# Altium PCB CW308A_Generic.PcbDoc
Units mil, origin at the board's own origin, x right, y up, seen from the top; angles counter-clockwise.
Board outline 2060 x 2680 mil, 2 copper layers (Top Layer, Bottom Layer); 6 components, 0 nets, 481 pads, 24 vias.
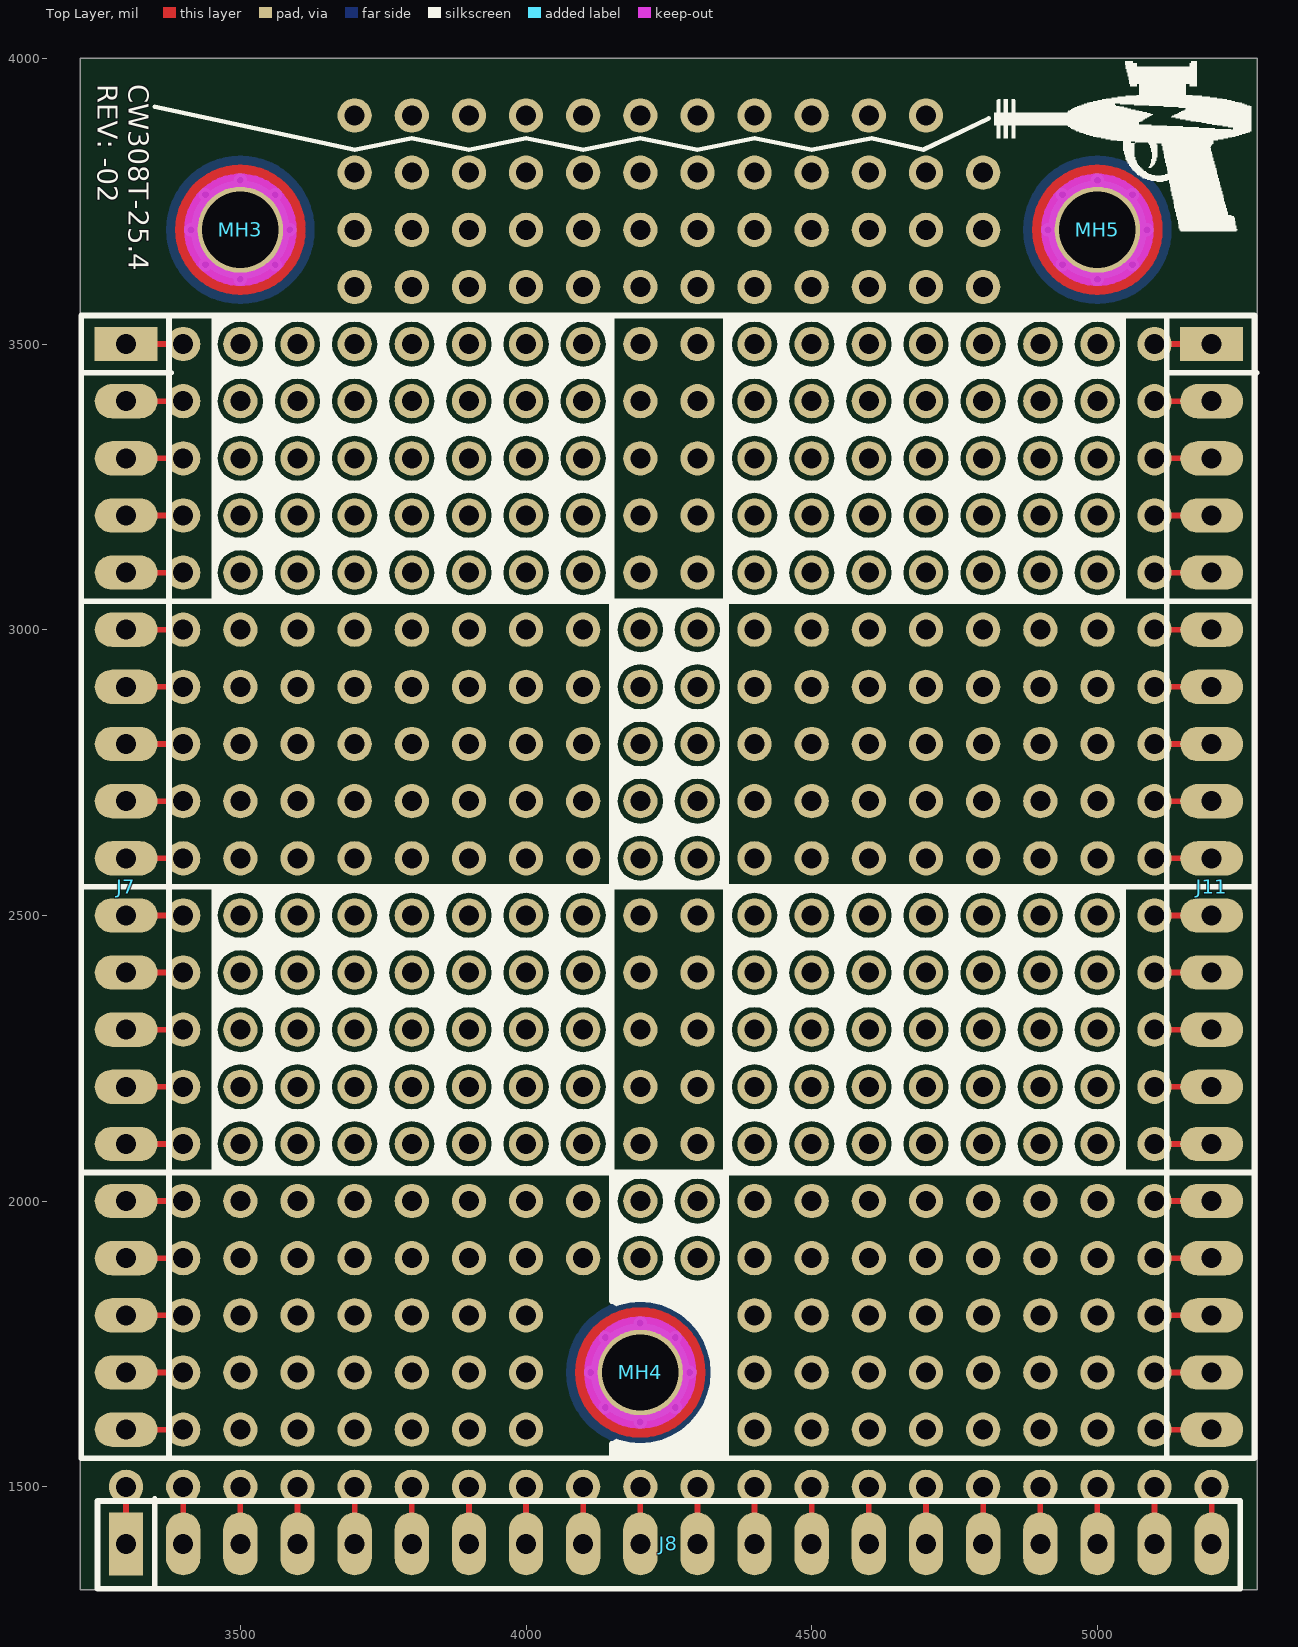
[diagram p0: Top Layer view]
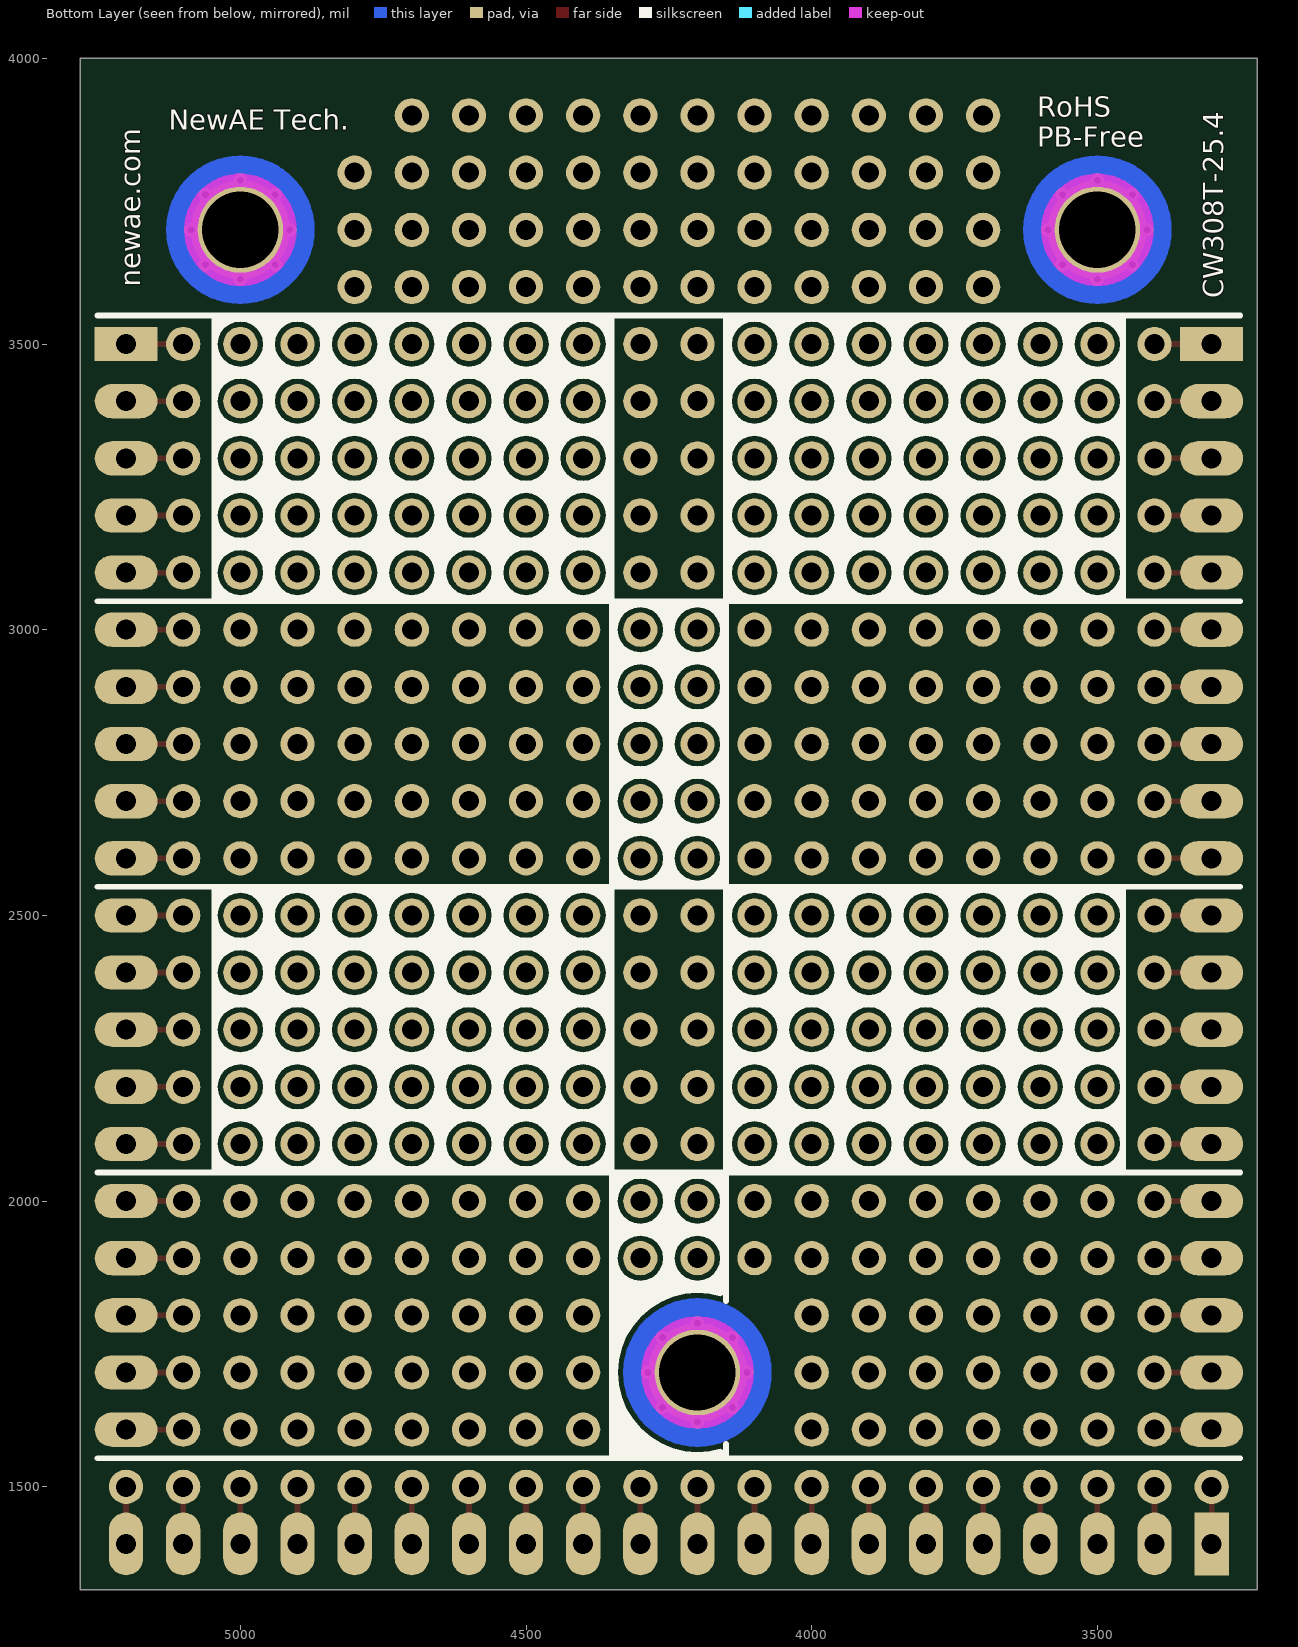
[diagram p1: Bottom Layer view, seen from below]

## Layer stack, top to bottom
Top Solder: solder mask 0.4, Solder Resist, Dk 3.5
Top Layer: signal copper 1.4
Dielectric 1: dielectric 12.6, FR-4, Dk 4.8
Bottom Layer: signal copper 1.4
Bottom Solder: solder mask 0.4, Solder Resist, Dk 3.5

## Board outline
3220,1320 3220,4000 5280,4000 5280,1320

## Design rules (kind name [scope] priority, off if disabled: settings)
Clearance [All] p1: gap=10 except(9: Arc-Poly Track-Poly SMDPad-Poly THPad-Poly Via-Poly Fill-Poly Poly-Poly)
PolygonConnect [All] p1: connectstyle=Relief reliefconductorwidth=10 reliefentries=4 polygonreliefangle="90 Angle" airgapwidth=10
RoutingVias [All] p1: holewidth=28 width=50 viastyle="Through Hole" minholewidth=28 minwidth=50 maxholewidth=28 maxwidth=50
SilkToSolderMaskClearance [InPadClass('All Pads')] p1: minsilkscreentomaskgap=10 clearancetoexposedcopper=FALSE
SolderMaskExpansion [All] p1: expansion=4
Width [All] p1: maxlimit=25 minlimit=10 preferedwidth=15 minimp=50.000000 maximp=50.000000 favimp=50.000000
29 further rules are at their usual default settings.

## Components (designator, comment, footprint, x,y, rotation, side; value= is the part's Value field where it differs from the comment)
J7 "20-Pin Header" 801-87-020-10-001101 3300,3500 r0 top locked
J8 "20-Pin Header" 801-87-020-10-001101 3300,1400 r90 top locked
J11 "20-Pin Header" 801-87-020-10-001101 5200,3500 r0 top locked
MH3 "Mounting-Hole-RND-Altium" Mounting-Hole-RND-Altium 3500,3700 r0 top locked
MH4 "Mounting-Hole-RND-Altium" Mounting-Hole-RND-Altium 4200,1700 r0 top locked
MH5 "Mounting-Hole-RND-Altium" Mounting-Hole-RND-Altium 5000,3700 r0 top locked

## Footprints (in the part's own frame and the unit in brackets; to place one, negate y for a bottom-side part, rotate by r counter-clockwise, add the part's x,y. Pads: shape width x height; smd on the part's side, far side on the other; paste and mask are expansions set on the pad)
801-87-020-10-001101 [mil]
  rect 110x60 hole 35: 1(0,0)
  oval 110x60 hole 35: 2(0,-100) 3(0,-200) 4(0,-300) 5(0,-400) 6(0,-500) 7(0,-600) 8(0,-700) 9(0,-800) 10(0,-900) 11(0,-1000) 12(0,-1100) 13(0,-1200) 14(0,-1300) 15(0,-1400) 16(0,-1500) 17(0,-1600) 18(0,-1700) 19(0,-1800) 20(0,-1900)
  silkscreen extent -79,-1950 79,50, body extent -50,-1950 50,50, height 224
Mounting-Hole-RND-Altium [mm] "Mounting Hole, Altium, 4.4mm pad, 3.4mm plated hole"
  round 4.4 hole 3.4 mask+0.038: MOUNT(0,0)
  Top Layer circle w1: c0,0 r2.4
  Bottom Layer circle w1.2: c0,0 r2.702
  Keep-Out Layer circle w0.6: c0,0 r2.2

## Part data
J7 J8 J11: library part 801-87-020-10-001101, "1x20 Header, Machined"
MH3 MH4 MH5: library part CMP-0001-00029-1, "Mounting Hole, Altium, 4.4mm pad, 3.4mm plated hole"

## Free pads (board coordinates)
  round 60 hole 35: 0(3300,1500) 0(3400,1500) 0(3400,1600) 0(3400,1700) 0(3400,1800) 0(3400,1900) 0(3400,2000) 0(3400,2100) 0(3400,2200) 0(3400,2300) 0(3400,2400) 0(3400,2500) 0(3400,2600) 0(3400,2700) 0(3400,2800) 0(3400,2900) 0(3400,3000) 0(3400,3100) 0(3400,3200) 0(3400,3300) 0(3400,3400) 0(3400,3500) 0(3500,1500) 0(3500,1600) 0(3500,1700) 0(3500,1800) 0(3500,1900) 0(3500,2000) 0(3500,2100) 0(3500,2200) 0(3500,2300) 0(3500,2400) 0(3500,2500) 0(3500,2600) 0(3500,2700) 0(3500,2800) 0(3500,2900) 0(3500,3000) 0(3500,3100) 0(3500,3200) 0(3500,3300) 0(3500,3400) 0(3500,3500) 0(3600,1500) 0(3700,1500) 0(3800,1500) 0(3900,1500) 0(4000,1500) 0(4100,1500) 0(4200,1500) 0(4300,1500) 0(4400,1500) 0(4400,1600) 0(4400,1700) 0(4400,1800) 0(4500,1500) 0(4600,1500) 0(4700,1500) 0(4800,1500) 0(4900,1500) 0(5000,1500) 0(5100,1500) 0(5100,1600) 0(5100,1700) 0(5100,1800) 0(5100,1900) 0(5100,2000) 0(5100,2100) 0(5100,2200) 0(5100,2300) 0(5100,2400) 0(5100,2500) 0(5100,2600) 0(5100,2700) 0(5100,2800) 0(5100,2900) 0(5100,3000) 0(5100,3100) 0(5100,3200) 0(5100,3300) 0(5100,3400) 0(5100,3500) 0(5200,1500) 1(3600,1600) 1(3600,1700) 1(3600,1800) 1(3600,1900) 1(3600,2000) 1(3600,2100) 1(3600,2200) 1(3600,2300) 1(3600,2400) 1(3600,2500) 1(3600,2600) 1(3600,2700) 1(3600,2800) 1(3600,2900) 1(3600,3000) 1(3600,3100) 1(3600,3200) 1(3600,3300) 1(3600,3400) 1(3600,3500) 1(4500,1600) 1(4500,1700) 1(4500,1800) 2(3700,1600) 2(3700,1700) 2(3700,1800) 2(3700,1900) 2(3700,2000) 2(3700,2100) 2(3700,2200) 2(3700,2300) 2(3700,2400) 2(3700,2500) 2(3700,2600) 2(3700,2700) 2(3700,2800) 2(3700,2900) 2(3700,3000) 2(3700,3100) 2(3700,3200) 2(3700,3300) 2(3700,3400) 2(3700,3500) 2(3700,3600) 2(3700,3700) 2(3700,3800) 2(3700,3900) 2(4600,1600) 2(4600,1700) 2(4600,1800) 3(3800,1600) 3(3800,1700) 3(3800,1800) 3(3800,1900) 3(3800,2000) 3(3800,2100) 3(3800,2200) 3(3800,2300) 3(3800,2400) 3(3800,2500) 3(3800,2600) 3(3800,2700) 3(3800,2800) 3(3800,2900) 3(3800,3000) 3(3800,3100) 3(3800,3200) 3(3800,3300) 3(3800,3400) 3(3800,3500) 3(3800,3600) 3(3800,3700) 3(3800,3800) 3(3800,3900) 3(4700,1600) 3(4700,1700) 3(4700,1800) 4(3900,1600) 4(3900,1700) 4(3900,1800) 4(3900,1900) 4(3900,2000) 4(3900,2100) 4(3900,2200) 4(3900,2300) 4(3900,2400) 4(3900,2500) 4(3900,2600) 4(3900,2700) 4(3900,2800) 4(3900,2900) 4(3900,3000) 4(3900,3100) 4(3900,3200) 4(3900,3300) 4(3900,3400) 4(3900,3500) 4(3900,3600) 4(3900,3700) 4(3900,3800) 4(3900,3900) 4(4800,1600) 4(4800,1700) 4(4800,1800) 5(4000,1600) 5(4000,1700) 5(4000,1800) 5(4000,1900) 5(4000,2000) 5(4000,2100) 5(4000,2200) 5(4000,2300) 5(4000,2400) 5(4000,2500) 5(4000,2600) 5(4000,2700) 5(4000,2800) 5(4000,2900) 5(4000,3000) 5(4000,3100) 5(4000,3200) 5(4000,3300) 5(4000,3400) 5(4000,3500) 5(4000,3600) 5(4000,3700) 5(4000,3800) 5(4000,3900) 5(4900,1600) 5(4900,1700) 5(4900,1800) 6(4100,1900) 6(4100,2000) 6(4100,2100) 6(4100,2200) 6(4100,2300) 6(4100,2400) 6(4100,2500) 6(4100,2600) 6(4100,2700) 6(4100,2800) 6(4100,2900) 6(4100,3000) 6(4100,3100) 6(4100,3200) 6(4100,3300) 6(4100,3400) 6(4100,3500) 6(4100,3600) 6(4100,3700) 6(4100,3800) 6(4100,3900) 7(4200,1900) 7(4200,2000) 7(4200,2100) 7(4200,2200) 7(4200,2300) 7(4200,2400) 7(4200,2500) 7(4200,2600) 7(4200,2700) 7(4200,2800) 7(4200,2900) 7(4200,3000) 7(4200,3100) 7(4200,3200) 7(4200,3300) 7(4200,3400) 7(4200,3500) 7(4200,3600) 7(4200,3700) 7(4200,3800) 7(4200,3900) 8(4300,1900) 8(4300,2000) 8(4300,2100) 8(4300,2200) 8(4300,2300) 8(4300,2400) 8(4300,2500) 8(4300,2600) 8(4300,2700) 8(4300,2800) 8(4300,2900) 8(4300,3000) 8(4300,3100) 8(4300,3200) 8(4300,3300) 8(4300,3400) 8(4300,3500) 8(4300,3600) 8(4300,3700) 8(4300,3800) 8(4300,3900) 9(4400,1900) 9(4400,2000) 9(4400,2100) 9(4400,2200) 9(4400,2300) 9(4400,2400) 9(4400,2500) 9(4400,2600) 9(4400,2700) 9(4400,2800) 9(4400,2900) 9(4400,3000) 9(4400,3100) 9(4400,3200) 9(4400,3300) 9(4400,3400) 9(4400,3500) 9(4400,3600) 9(4400,3700) 9(4400,3800) 9(4400,3900) 10(4500,1900) 10(4500,2000) 10(4500,2100) 10(4500,2200) 10(4500,2300) 10(4500,2400) 10(4500,2500) 10(4500,2600) 10(4500,2700) 10(4500,2800) 10(4500,2900) 10(4500,3000) 10(4500,3100) 10(4500,3200) 10(4500,3300) 10(4500,3400) 10(4500,3500) 10(4500,3600) 10(4500,3700) 10(4500,3800) 10(4500,3900) 11(4600,1900) 11(4600,2000) 11(4600,2100) 11(4600,2200) 11(4600,2300) 11(4600,2400) 11(4600,2500) 11(4600,2600) 11(4600,2700) 11(4600,2800) 11(4600,2900) 11(4600,3000) 11(4600,3100) 11(4600,3200) 11(4600,3300) 11(4600,3400) 11(4600,3500) 11(4600,3600) 11(4600,3700) 11(4600,3800) 11(4600,3900) 12(4700,1900) 12(4700,2000) 12(4700,2100) 12(4700,2200) 12(4700,2300) 12(4700,2400) 12(4700,2500) 12(4700,2600) 12(4700,2700) 12(4700,2800) 12(4700,2900) 12(4700,3000) 12(4700,3100) 12(4700,3200) 12(4700,3300) 12(4700,3400) 12(4700,3500) 12(4700,3600) 12(4700,3700) 12(4700,3800) 12(4700,3900) 13(4800,1900) 13(4800,2000) 13(4800,2100) 13(4800,2200) 13(4800,2300) 13(4800,2400) 13(4800,2500) 13(4800,2600) 13(4800,2700) 13(4800,2800) 13(4800,2900) 13(4800,3000) 13(4800,3100) 13(4800,3200) 13(4800,3300) 13(4800,3400) 13(4800,3500) 13(4800,3600) 13(4800,3700) 13(4800,3800) 13(4900,1900) 13(4900,2000) 13(4900,2100) 13(4900,2200) 13(4900,2300) 13(4900,2400) 13(4900,2500) 13(4900,2600) 13(4900,2700) 13(4900,2800) 13(4900,2900) 13(4900,3000) 13(4900,3100) 13(4900,3200) 13(4900,3300) 13(4900,3400) 13(4900,3500) 13(5000,1900) 13(5000,2000) 13(5000,2100) 13(5000,2200) 13(5000,2300) 13(5000,2400) 13(5000,2500) 13(5000,2600) 13(5000,2700) 13(5000,2800) 13(5000,2900) 13(5000,3000) 13(5000,3100) 13(5000,3200) 13(5000,3300) 13(5000,3400) 13(5000,3500) 15(5000,1700) 16(5000,1600) 17(5000,1800)

## Via types
v1: diameter 23.62, hole 11.81, Top Layer to Bottom Layer, tented both sides, 24 vias

## Nets (pads, with @x,y where several pads share a name; then routed paths per layer and width w, separated by ;. In a path a pad name is that pad's centre, name@x,y a point inside that pad or via, vN(x,y) a via of type N, cw(c..) or ccw(c..) an arc to the next point about the centre after c; other vN are vias at no path point)
pads on no net: J7.1 J7.2 J7.3 J7.4 J7.5 J7.6 J7.7 J7.8 J7.9 J7.10 J7.11 J7.12 J7.13 J7.14 J7.15 J7.16 J7.17 J7.18 J7.19 J7.20 J8.1 J8.2 J8.3 J8.4 J8.5 J8.6 J8.7 J8.8 J8.9 J8.10 J8.11 J8.12 J8.13 J8.14 J8.15 J8.16 J8.17 J8.18 J8.19 J8.20 J11.1 J11.2 J11.3 J11.4 J11.5 J11.6 J11.7 J11.8 J11.9 J11.10 J11.11 J11.12 J11.13 J11.14 J11.15 J11.16 J11.17 J11.18 J11.19 J11.20 MH3.MOUNT MH4.MOUNT MH5.MOUNT
copper on no net: | length 6000
  Top Layer w10: 3300,1400 3300,1500 ; 3300,1600 3400,1600 ; 3300,1700 3400,1700 ; 3300,1800 3400,1800 ; 3300,1900 3400,1900 ; 3300,2000 3400,2000 ; 3300,2100 3400,2100 ; 3300,2200 3400,2200 ; 3300,2300 3400,2300 ; 3300,2400 3400,2400 ; 3300,2500 3400,2500 ; 3300,2600 3400,2600 ; 3300,2700 3400,2700 ; 3300,2800 3400,2800 ; 3300,2900 3400,2900 ; 3300,3000 3400,3000 ; 3300,3100 3400,3100 ; 3300,3200 3400,3200 ; 3300,3300 3400,3300 ; 3300,3400 3400,3400 ; 3300,3500 3400,3500 ; 3400,1400 3400,1500 ; 3500,1400 3500,1500 ; 3600,1400 3600,1500 ; 3700,1400 3700,1500 ; 3800,1400 3800,1500 ; 3900,1400 3900,1500 ; 4000,1400 4000,1500 ; 4100,1400 4100,1500 ; 4200,1400 4200,1500 ; 4300,1400 4300,1500 ; 4400,1400 4400,1500 ; 4500,1400 4500,1500 ; 4600,1400 4600,1500 ; 4700,1400 4700,1500 ; 4800,1400 4800,1500 ; 4900,1400 4900,1500 ; 5000,1400 5000,1500 ; 5100,1400 5100,1500 ; 5100,1600 5200,1600 ; 5100,1700 5200,1700 ; 5100,1800 5200,1800 ; 5100,1900 5200,1900 ; 5100,2000 5200,2000 ; 5100,2100 5200,2100 ; 5100,2200 5200,2200 ; 5100,2300 5200,2300 ; 5100,2400 5200,2400 ; 5100,2500 5200,2500 ; 5100,2600 5200,2600 ; 5100,2700 5200,2700 ; 5100,2800 5200,2800 ; 5100,2900 5200,2900 ; 5100,3000 5200,3000 ; 5100,3100 5200,3100 ; 5100,3200 5200,3200 ; 5100,3300 5200,3300 ; 5100,3400 5200,3400 ; 5100,3500 5200,3500 ; 5200,1400 5200,1500
  other v1: 4200,1613.39 4138.75,1638.75 4261.25,1638.75 4113.39,1700 4286.61,1700 4138.75,1761.25 4261.25,1761.25 4200,1786.61 3500,3613.39 5000,3613.39 3438.75,3638.75 3561.25,3638.75 4938.75,3638.75 5061.25,3638.75 3413.39,3700 3586.61,3700 4913.39,3700 5086.61,3700 3438.75,3761.25 3561.25,3761.25 4938.75,3761.25 5061.25,3761.25 3500,3786.61 5000,3786.61

## Silkscreen, mask and mechanical layers (free items; w line width, h text height)
Top Overlay:
  drawing of 32 lines, arcs and shapes, not listed
  text "REV: -02" at 3250,3955 h35 r270
  text "CW308T-25.4" at 3305,3955 h35 r270
Bottom Overlay:
  region: 4350,1550 4150,1550 4150,1561 4160,1566.66 4178.19,1562.29 4200,1560.58 4221.81,1562.29 4243.08,1567.4 4263.3,1575.77 4281.95,1587.2 4298.59,1601.41 4312.8,1618.05 4324.23,1636.7 4332.6,1656.92 4337.71,1678.19 4339.42,1700 4337.71,1721.81 4332.6,1743.08 4324.23,1763.3 4312.8,1781.95 4298.59,1798.59 4281.95,1812.8 4263.3,1824.23 4243.08,1832.6 4221.81,1837.71 4200,1839.42 4178.19,1837.71 4160,1833.34 4150,1839 4150,2050 4350,2050 hole: 4300,2039.34 4289.82,2038 4280.33,2034.07 4272.18,2027.82 4265.93,2019.67 4262,2010.18 4260.66,2000 4262,1989.82 4265.93,1980.33 4272.18,1972.18 4280.33,1965.93 4289.82,1962 4300,1960.66 4310.18,1962 4319.67,1965.93 4327.82,1972.18 4334.07,1980.33 4338,1989.82 4339.34,2000 4338,2010.18 4334.07,2019.67 4327.82,2027.82 4319.67,2034.07 4310.18,2038 hole: 4200,2039.34 4189.82,2038 4180.33,2034.07 4172.18,2027.82 4165.93,2019.67 4162,2010.18 4160.66,2000 4162,1989.82 4165.93,1980.33 4172.18,1972.18 4180.33,1965.93 4189.82,1962 4200,1960.66 4210.18,1962 4219.67,1965.93 4227.82,1972.18 4234.07,1980.33 4238,1989.82 4239.34,2000 4238,2010.18 4234.07,2019.67 4227.82,2027.82 4219.67,2034.07 4210.18,2038 hole: 4300,1939.34 4289.82,1938 4280.33,1934.07 4272.18,1927.82 4265.93,1919.67 4262,1910.18 4260.66,1900 4262,1889.82 4265.93,1880.33 4272.18,1872.18 4280.33,1865.93 4289.82,1862 4300,1860.66 4310.18,1862 4319.67,1865.93 4327.82,1872.18 4334.07,1880.33 4338,1889.82 4339.34,1900 4338,1910.18 4334.07,1919.67 4327.82,1927.82 4319.67,1934.07 4310.18,1938 hole: 4200,1939.34 4189.82,1938 4180.33,1934.07 4172.18,1927.82 4165.93,1919.67 4162,1910.18 4160.66,1900 4162,1889.82 4165.93,1880.33 4172.18,1872.18 4180.33,1865.93 4189.82,1862 4200,1860.66 4210.18,1862 4219.67,1865.93 4227.82,1872.18 4234.07,1880.33 4238,1889.82 4239.34,1900 4238,1910.18 4234.07,1919.67 4227.82,1927.82 4219.67,1934.07 4210.18,1938
  region: 5 vertices and 10 holes, not listed, extent 4150,2550 4350,3050
  region: 5 vertices and 35 holes, not listed, extent 4350,2050 5050,2550
  region: 5 vertices and 35 holes, not listed, extent 3450,2050 4150,2550
  region: 5 vertices and 35 holes, not listed, extent 4350,3050 5050,3550
  region: 5 vertices and 35 holes, not listed, extent 3450,3050 4150,3550
  lines w10: 3250,1550 5250,1550 ; 3250,2050 5250,2050 ; 3250,2550 5250,2550 ; 3250,3050 5250,3050 ; 3250,3550 5250,3550 ; 4150,1550 4150,1575 ; 4150,1825 4150,3550 ; 4350,1550 4350,3550
  text "NewAE Tech." at 5125,3875 h35
  text "RoHS / PB-Free" at 3605,3845 h35
  text "newae.com" at 5175,3600 h35 r270
  text "CW308T-25.4" at 3280,3580 h35 r270
Mechanical 3:
  lines w15: 3225,4000 3220,4000 ; 3220,4000 3220,1320 5280,1320 5280,1955 5280,3315 5280,4000 3220,4000